# Altium PCB Trackpoint.PcbDoc
Units mm, origin at the board's own origin, x right, y up, seen from the top; angles counter-clockwise.
Board outline 50.8 x 68.8 mm, 4 copper layers (Top Layer, Plane 1, Plane 2, Bottom Layer), stack 0.781 mm thick; 62 components, 31 nets, 224 pads, 191 vias.
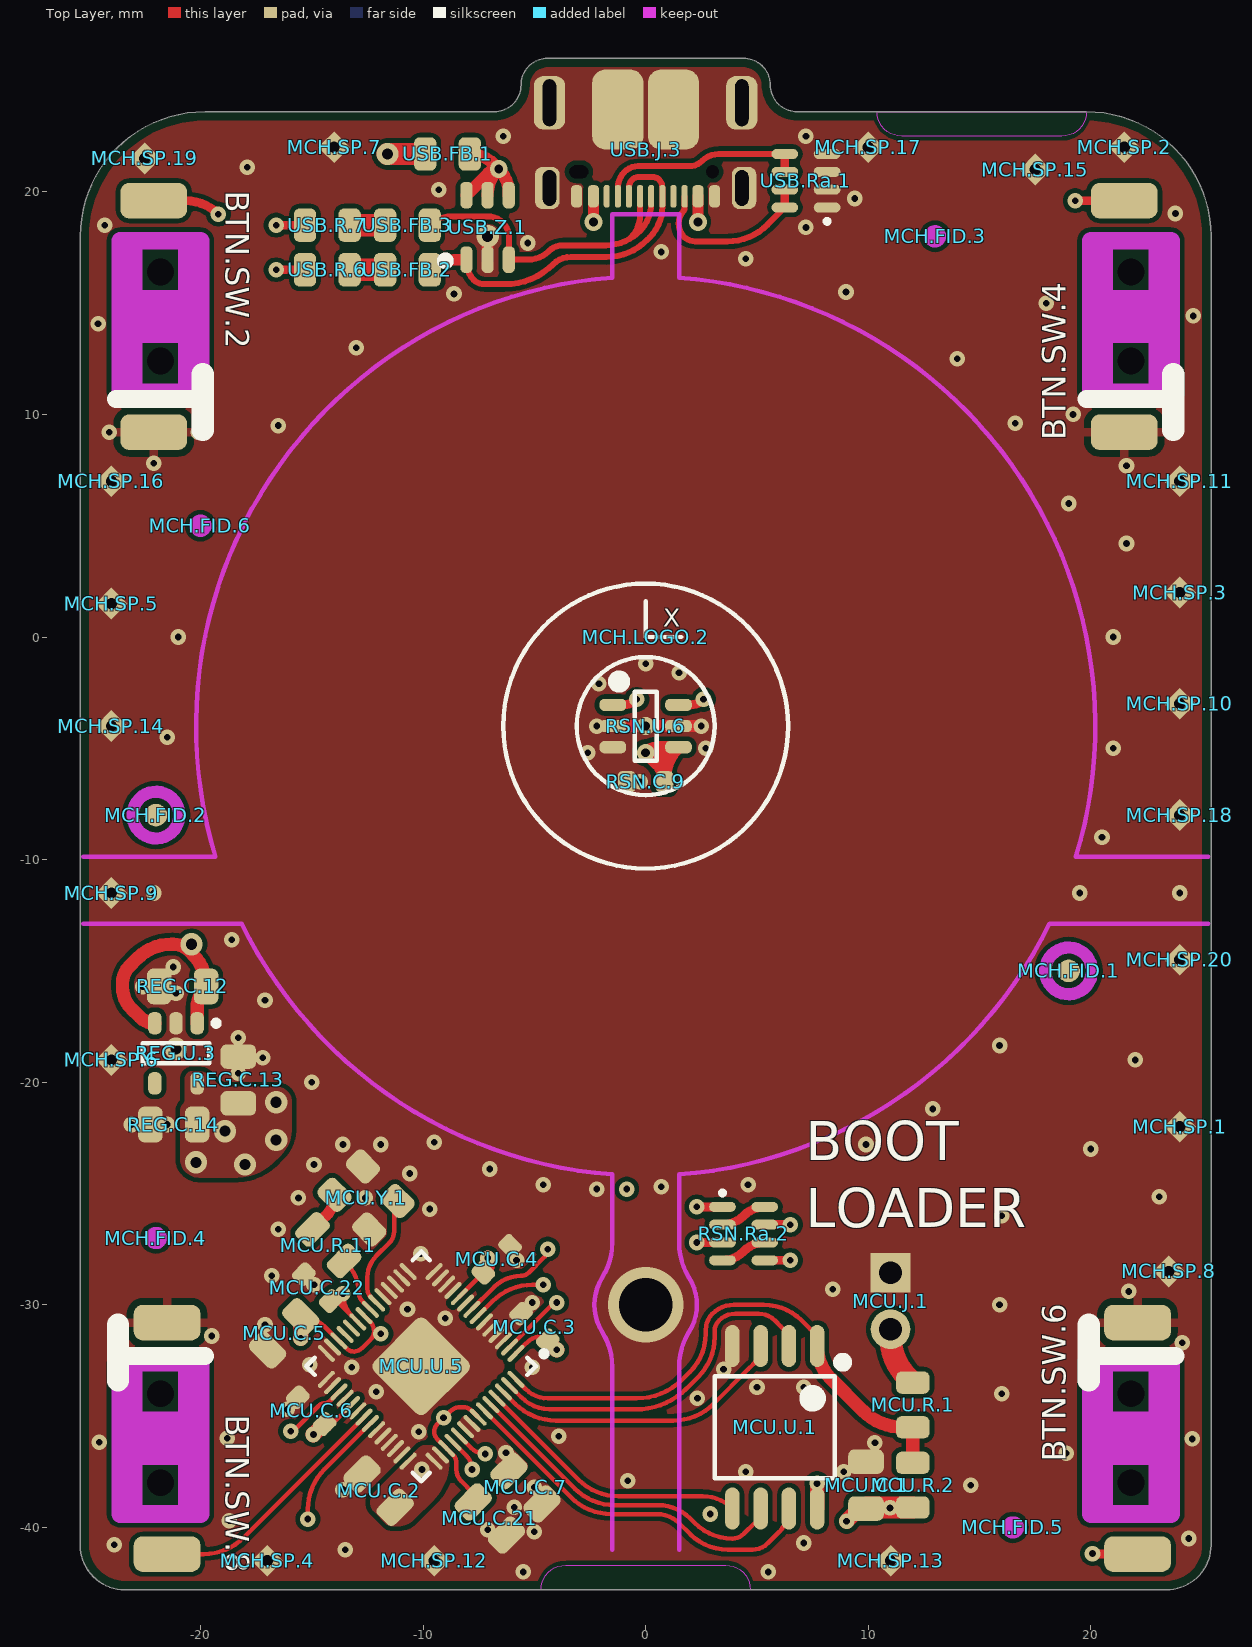
[diagram p0: Top Layer view]
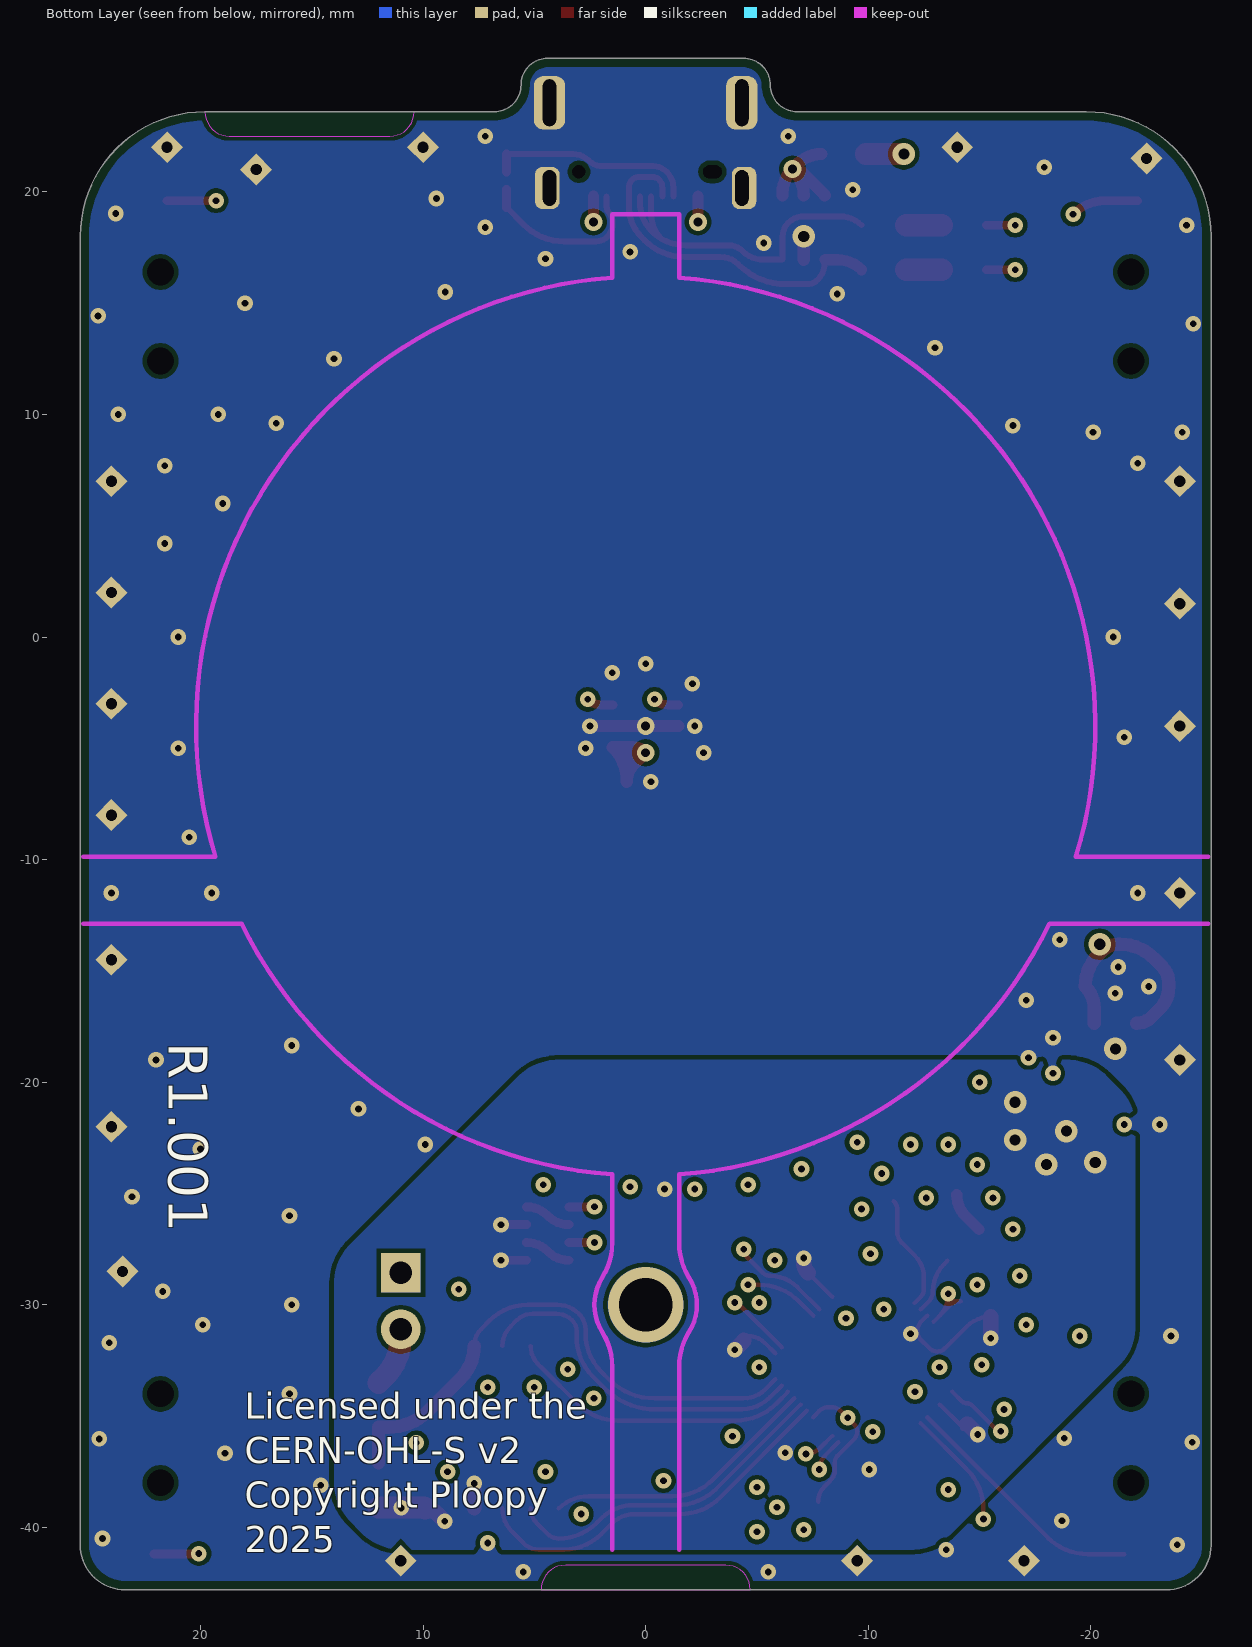
[diagram p1: Bottom Layer view, seen from below]
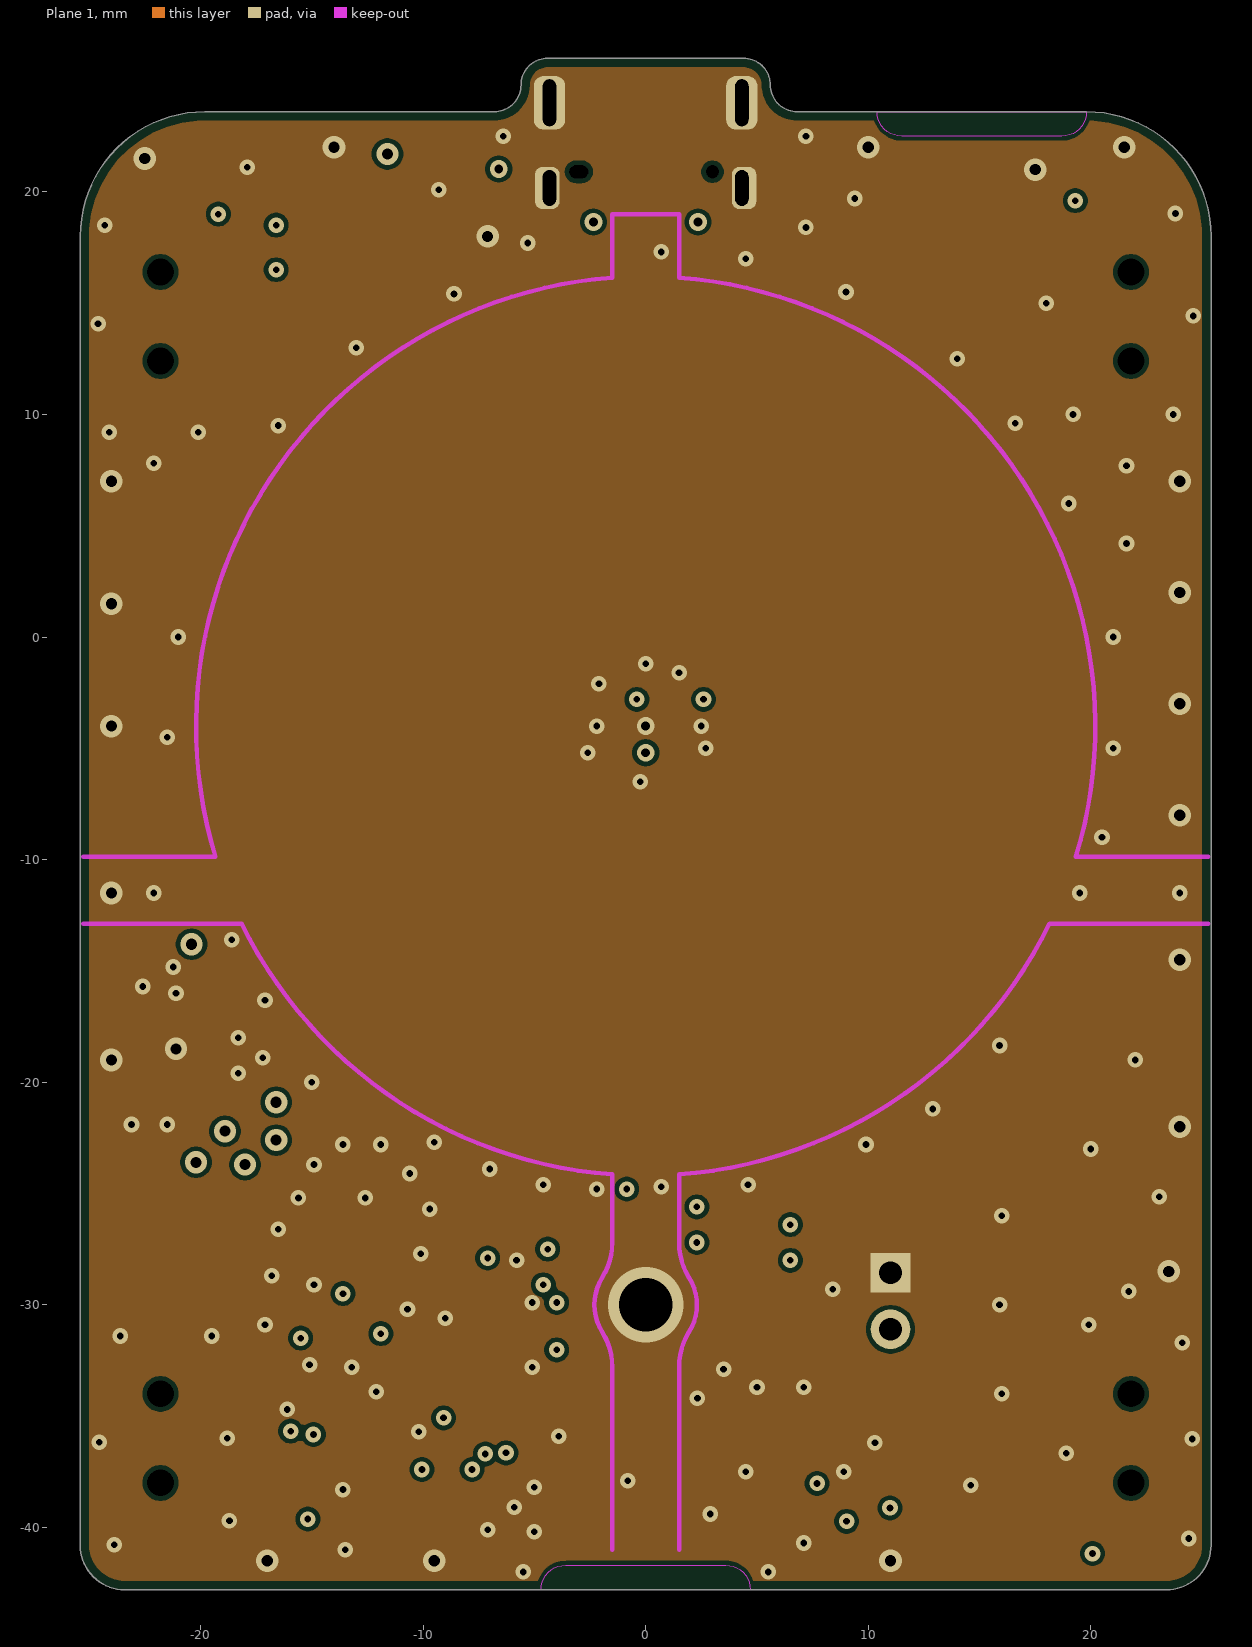
[diagram p2: Plane 1]
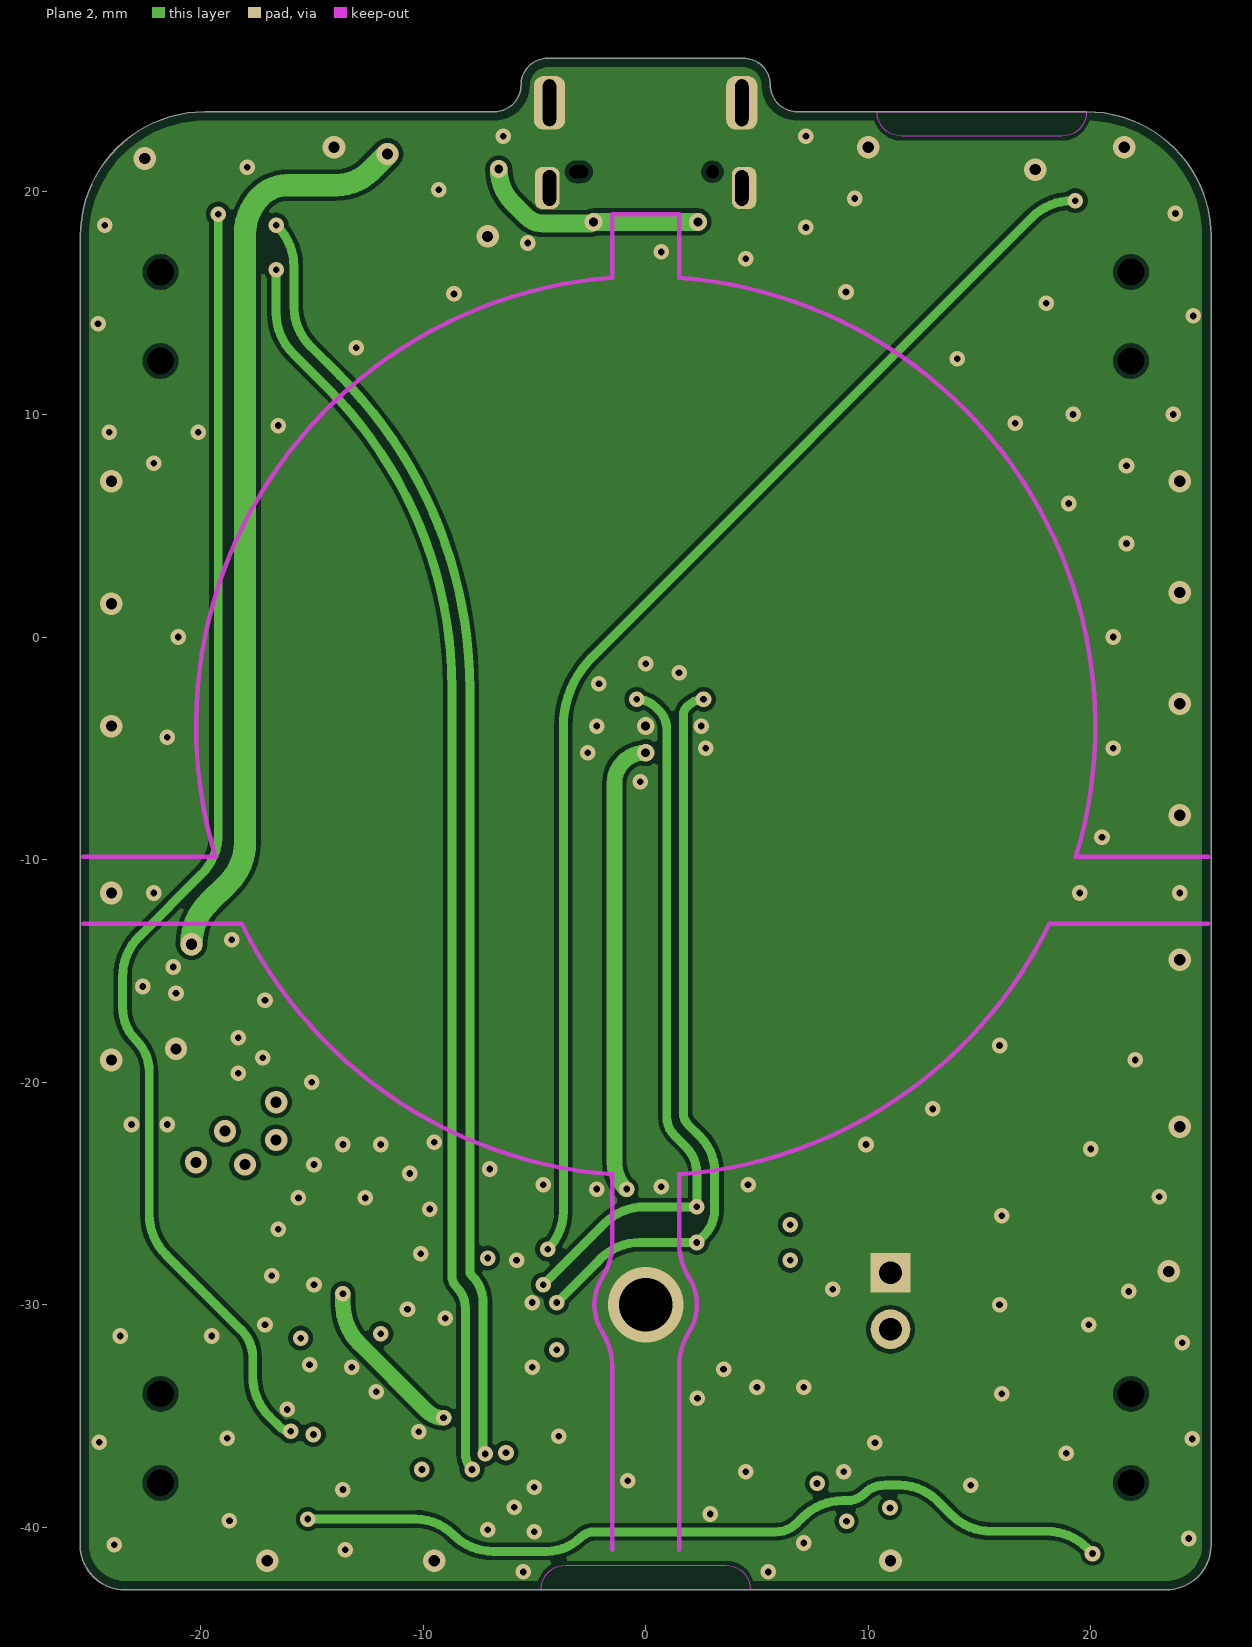
[diagram p3: Plane 2]

## Layer stack, top to bottom
Top Mask: solder mask 0.01, Solder Resist, Dk 3.5
Top Layer: signal copper 0.036
Dielectric 1: prepreg 0.127, FR-4, Dk 4.2
Plane 1: signal copper 0.036
Dielectric 4: core 0.383, Dk 4.2
Plane 2: signal copper 0.036
Dielectric 2: prepreg 0.127, Dk 4.2
Bottom Layer: signal copper 0.036
Bottom Solder: solder mask 0.01, Solder Resist, Dk 3.5

## Board outline
-25.4,-40.8 -25.4,18 cw(c-19.8,18) -19.8,23.6 -6.8,23.6 ccw(c-6.8,24.8) -5.6,24.8 cw(c-4.4,24.8) -4.4,26 4.4,26 cw(c4.4,24.8) 5.6,24.8 ccw(c6.8,24.8) 6.8,23.6 19.8,23.6 cw(c19.8,18) 25.4,18 25.4,-40.8 cw(c23.4,-40.8) 23.4,-42.8 -23.4,-42.8 cw(c-23.4,-40.8)

## Design rules (kind name [scope] priority, off if disabled: settings)
BoardOutlineClearance [(Not HasFootprint('SPARKGAP'))] p1: gap=0.4 ignorepadtopadclearanceinfootprint=FALSE except(0: Arc-SplitBarrior Arc-SplitContinuation Track-SplitBarrior Track-SplitContinuation Fill-SplitBarrior Fill-SplitContinuation Poly-SplitBarrior Poly-SplitContinuation Region-SplitBarrior Region-SplitContinuation Text-SplitBarrior Text-SplitContinuation)
Clearance "HighV Pads" [(InNetClass('HighV') AND (IsPad OR IsVia)) vs IsPad OR IsVia] p1: gap=0.4 ignorepadtopadclearanceinfootprint=FALSE except(0: Arc-Hole Track-Hole SMDPad-Hole THPad-Hole Via-Hole Fill-Hole Poly-Hole Region-Hole Text-Hole) // Establishes minimum clearance between bare pads that are high voltage, per IPC2221A Table 6-1, 51-100V, condition A6
Clearance Inter-Pad [IsPad vs IsPad] p2: gap=0.2 ignorepadtopadclearanceinfootprint=FALSE except(0: Arc-Hole Track-Hole SMDPad-Hole THPad-Hole Via-Hole Fill-Hole Poly-Hole Region-Hole Text-Hole)
Clearance "Spark Gaps" [InNetClass('Spark Gap') vs InNet('GND') And InPoly] p3: gap=0.635 ignorepadtopadclearanceinfootprint=FALSE except(0: Arc-Hole Track-Hole SMDPad-Hole THPad-Hole Via-Hole Fill-Hole Poly-Hole Region-Hole Text-Hole)
Clearance FIDs [Name like 'FID*'] p4: gap=1.016 ignorepadtopadclearanceinfootprint=FALSE except(0: Arc-Hole Track-Hole SMDPad-Hole THPad-Hole Via-Hole Fill-Hole Poly-Hole Region-Hole Text-Hole)
Clearance "Inner Planes" [InPoly AND OnMid] p5: gap=0.2 ignorepadtopadclearanceinfootprint=FALSE // Defines a larger clearance for planes on inner layers.
Clearance "All Planes" [InPoly] p6: gap=0.2 ignorepadtopadclearanceinfootprint=FALSE except(0: Arc-Hole Track-Hole SMDPad-Hole THPad-Hole Via-Hole Fill-Hole Poly-Hole Region-Hole Text-Hole) // Defines minimum clearance between planes on the same layer.
Clearance "Inner Layer Clearance" [OnMid vs OnMid] p7: gap=0.3 ignorepadtopadclearanceinfootprint=FALSE except(0: Arc-Hole Track-Hole SMDPad-Hole THPad-Hole Via-Hole Fill-Hole Poly-Hole Region-Hole Text-Hole) // We will give inner layers more spacing because they tend to be subject to stricter process limits.
Clearance [All] p8: gap=0.2 ignorepadtopadclearanceinfootprint=FALSE // 2 oz (70um) boards require at least 10mil spacing. We give a bit more to make sure things work well.
ComponentClearance "Terminal Block" [(HasFootprint('Phoenix 1933189 - Header')) vs (HasFootprint('Phoenix 1933189 - Header'))] p1: gap=-2.286 collisioncheckmode=3 verticalgap=0.254 showdistances=FALSE
ComponentClearance "FET/TP self Clearance" [(Name like 'Q*') Or (Name like 'TP*') vs (Name like 'Q*') Or (Name like 'TP*')] p2: gap=0.254 collisioncheckmode=3 verticalgap=0.254 showdistances=FALSE
ComponentClearance [Not ((Name like 'H*') Or (Name like 'FID*') Or (Name like 'SP*')) vs Not ((Name like 'H*') Or (Name like 'FID*') Or (Name like 'SP*'))] p3: gap=0.5 collisioncheckmode=3 verticalgap=0.5 showdistances=FALSE
DiffPairsRouting [All] p1: maxlimit=0.508 minlimit=0.279 mostfreqgap=0.381 toplayer_prefgap=0.279 toplayer_minwidth=0.279 toplayer_maxwidth=0.508 toplayer_prefwidth=0.381 midlayer2_mingap=0.305 midlayer2_minwidth=0.305 midlayer2_maxwidth=0.508 midlayer2_prefwidth=0.381 midlayer3_prefgap=0.279 midlayer3_minwidth=0.279 midlayer3_maxwidth=0.508 midlayer3_prefwidth=0.381 bottomlayer_prefgap=0.279 bottomlayer_minwidth=0.279 bottomlayer_maxwidth=0.508 bottomlayer_prefwidth=0.381 substack1={D919DD2D-F60F-4B9F-B5AE-F3E69D6E268F} toplayer_{d919dd2d-f60f-4b9f-b5ae-f3e69d6e268f}_minwidth=0.381 toplayer_{d919dd2d-f60f-4b9f-b5ae-f3e69d6e268f}_maxwidth=0.381 toplayer_{d919dd2d-f60f-4b9f-b5ae-f3e69d6e268f}_prefwidth=0.381 midlayer2_{d919dd2d-f60f-4b9f-b5ae-f3e69d6e268f}_minwidth=0.381 midlayer2_{d919dd2d-f60f-4b9f-b5ae-f3e69d6e268f}_maxwidth=0.381 midlayer2_{d919dd2d-f60f-4b9f-b5ae-f3e69d6e268f}_prefwidth=0.381 midlayer3_{d919dd2d-f60f-4b9f-b5ae-f3e69d6e268f}_minwidth=0.381 midlayer3_{d919dd2d-f60f-4b9f-b5ae-f3e69d6e268f}_maxwidth=0.381 midlayer3_{d919dd2d-f60f-4b9f-b5ae-f3e69d6e268f}_prefwidth=0.381 bottomlayer_{d919dd2d-f60f-4b9f-b5ae-f3e69d6e268f}_minwidth=0.381 bottomlayer_{d919dd2d-f60f-4b9f-b5ae-f3e69d6e268f}_maxwidth=0.381 bottomlayer_{d919dd2d-f60f-4b9f-b5ae-f3e69d6e268f}_prefwidth=0.381 maxuncoupledlength=12.7
Height [All] p1: minheight=0 maxheight=41 prefheight=12.7
HoleSize [All] p1: absolutevalues=TRUE maxlimit=100 minlimit=0.3 maxpercent=80.000 minpercent=20.000
HoleToHoleClearance [All] p1: gap=0.6 allowstackedmicrovias=TRUE
LayerPairs [All] p1: enforce=FALSE
MinimumSolderMaskSliver [All] p1: minsoldermaskwidth=0.09
NetAntennae [Not (HasFootprint('BALANCE_RESISTOR'))] p1: netantennaetolerance=0
PasteMaskExpansion [All] p1: expansion=-0.025
PlaneClearance [All] p1: clearance=0.3
PlaneConnect [All] p1: pad.planeconnectstyle=Relief pad.reliefexpansion=0.5 pad.reliefentries=4 pad.reliefconductorwidth=0.5 pad.reliefairgap=0.25 via.planeconnectstyle=Direct via.reliefexpansion=0.5 via.reliefentries=4 via.reliefconductorwidth=0.5 via.reliefairgap=0.25
PolygonConnect "PolygonConnect Spark Gap" [HasFootprint('SparkGap')] p1: connectstyle=Direct reliefconductorwidth=0.254 reliefentries=4 polygonreliefangle="90 Angle" airgapwidth=0.254 // This rule makes it so spark gaps get direct connections to ground planes.
PolygonConnect PolygonConnect_GND [All vs InNet('GND')] p2: connectstyle=Direct reliefconductorwidth=0.5 reliefentries=4 polygonreliefangle="90 Angle" airgapwidth=0.25 // This rule specifies all vias and holes connected to a GND plane have direct connections.
PolygonConnect [All] p3: connectstyle=Direct reliefconductorwidth=0.5 reliefentries=4 polygonreliefangle="90 Angle" airgapwidth=0.25
RoutingVias [All] p1: holewidth=0.5 width=1 viastyle="Through Hole" minholewidth=0.2 minwidth=0.5 maxholewidth=5.08 maxwidth=6.35
ShortCircuit [Not (InPadClass('TraceResistorPads')) vs Not (InPadClass('TraceResistorPads'))] p1: allowed=FALSE
SilkToBoardRegionClearance [All] p1 off:
SilkToSilkClearance [All] p1 off: silktosilkclearance=0.254
SilkToSolderMaskClearance SilkscreenOverComponentPads [IsPad] p1: minsilkscreentomaskgap=0.102 clearancetoexposedcopper=FALSE
SolderMaskExpansion SolderMaskExpansion_via [IsVia] p1: expansion=0.102 istentingtop=TRUE
SolderMaskExpansion [All] p2: expansion=0.076 istentingtop=FALSE
Width [All] p1: maxlimit=50.8 minlimit=0.2 preferedwidth=0.4 midlayer2_minwidth=0.35 midlayer3_minwidth=0.35 bottomlayer_minwidth=0.26 substack1={D919DD2D-F60F-4B9F-B5AE-F3E69D6E268F} toplayer_{d919dd2d-f60f-4b9f-b5ae-f3e69d6e268f}_minwidth=0.26 midlayer2_{d919dd2d-f60f-4b9f-b5ae-f3e69d6e268f}_minwidth=0.35 midlayer3_{d919dd2d-f60f-4b9f-b5ae-f3e69d6e268f}_minwidth=0.35 bottomlayer_{d919dd2d-f60f-4b9f-b5ae-f3e69d6e268f}_minwidth=0.26 minimp=50.000000 maximp=50.000000 favimp=50.000000
15 further rules are at their usual default settings.

## Classes and differential pairs
component class RSN: RSN.C.9 RSN.Ra.2 RSN.U.6
component class BTN: BTN.SW.2 BTN.SW.4 BTN.SW.6 BTN.SW.8
component class USB: USB.FB.1 USB.FB.2 USB.FB.3 USB.J.3 USB.R.6 USB.R.7 USB.Ra.1 USB.Z.1
component class REG: REG.C.12 REG.C.13 REG.C.14 REG.U.3
component class MCU: MCU.C.1 MCU.C.2 MCU.C.3 MCU.C.4 MCU.C.5 MCU.C.6 MCU.C.7 MCU.C.21 MCU.C.22 MCU.J.1 MCU.R.1 MCU.R.2 MCU.R.11 MCU.U.1 MCU.U.5 MCU.Y.1
component class MCH: MCH.FID.1 MCH.FID.2 MCH.FID.3 MCH.FID.4 MCH.FID.5 MCH.FID.6 MCH.LOGO.2 MCH.SP.1 MCH.SP.2 MCH.SP.3 MCH.SP.4 MCH.SP.5 MCH.SP.6 MCH.SP.7 MCH.SP.8 MCH.SP.9 MCH.SP.10 MCH.SP.11 MCH.SP.12 MCH.SP.13 MCH.SP.14 MCH.SP.15 MCH.SP.16 MCH.SP.17 MCH.SP.18 MCH.SP.19 MCH.SP.20

## Components (designator, comment, footprint, x,y, rotation, side; value= is the part's Value field where it differs from the comment)
BTN.SW.2 "D2LS-21" D2LS-21 -21.8,14.4 r90 top (schematic designator SW2)
BTN.SW.4 "D2LS-21" D2LS-21 21.8,14.4 r90 top (schematic designator SW4)
BTN.SW.6 "D2LS-21" D2LS-21 21.8,-36 r270 top (schematic designator SW6)
BTN.SW.8 "D2LS-21" D2LS-21 -21.8,-36 r270 top (schematic designator SW8)
MCH.FID.1 "IPC-7351 Fiducial 1mm" FIDUCIAL_1.5 19,-15 r90 top (schematic designator FID1)
MCH.FID.2 "IPC-7351 Fiducial 1mm" FIDUCIAL_1.5 -22,-8 r90 top (schematic designator FID2)
MCH.FID.3 "1mm Fiducial for OpenPNP" FIDUCIAL-NEW 13,18 r0 top (schematic designator FID3)
MCH.FID.4 "1mm Fiducial for OpenPNP" FIDUCIAL-NEW -22,-27 r0 top (schematic designator FID4)
MCH.FID.5 "1mm Fiducial for OpenPNP" FIDUCIAL-NEW 16.5,-40 r0 top (schematic designator FID5)
MCH.FID.6 "1mm Fiducial for OpenPNP" FIDUCIAL-NEW -20,5 r0 top (schematic designator FID6)
MCH.LOGO.2 "Coordinate system marker for assembly" "Coordinate System" 0,0 r0 top (schematic designator LOGO2)
MCH.SP.1 "Spark Gap" SparkGap 24,-22 r90 top (schematic designator SP1)
MCH.SP.2 "Spark Gap" SparkGap 21.5,22 r90 top (schematic designator SP2)
MCH.SP.3 "Spark Gap" SparkGap 24,2 r90 top (schematic designator SP3)
MCH.SP.4 "Spark Gap" SparkGap -17,-41.5 r90 top (schematic designator SP4)
MCH.SP.5 "Spark Gap" SparkGap -24,1.5 r90 top (schematic designator SP5)
MCH.SP.6 "Spark Gap" SparkGap -24,-19 r90 top (schematic designator SP6)
MCH.SP.7 "Spark Gap" SparkGap -14,22 r90 top (schematic designator SP7)
MCH.SP.8 "Spark Gap" SparkGap 23.5,-28.5 r90 top (schematic designator SP8)
MCH.SP.9 "Spark Gap" SparkGap -24,-11.5 r90 top (schematic designator SP9)
MCH.SP.10 "Spark Gap" SparkGap 24,-3 r90 top (schematic designator SP10)
MCH.SP.11 "Spark Gap" SparkGap 24,7 r90 top (schematic designator SP11)
MCH.SP.12 "Spark Gap" SparkGap -9.5,-41.5 r90 top (schematic designator SP12)
MCH.SP.13 "Spark Gap" SparkGap 11,-41.5 r90 top (schematic designator SP13)
MCH.SP.14 "Spark Gap" SparkGap -24,-4 r90 top (schematic designator SP14)
MCH.SP.15 "Spark Gap" SparkGap 17.5,21 r90 top (schematic designator SP15)
MCH.SP.16 "Spark Gap" SparkGap -24,7 r90 top (schematic designator SP16)
MCH.SP.17 "Spark Gap" SparkGap 10,22 r90 top (schematic designator SP17)
MCH.SP.18 "Spark Gap" SparkGap 24,-8 r90 top (schematic designator SP18)
MCH.SP.19 "Spark Gap" SparkGap -22.5,21.5 r90 top (schematic designator SP19)
MCH.SP.20 "Spark Gap" SparkGap 24,-14.5 r90 top (schematic designator SP20)
MCU.C.1 "0805 X5R" "0805 - TALL" 9.9,-38.1 r0 top value="1uF 25V" (schematic designator C1)
MCU.C.2 "0805 X5R" "0805 - TALL" -11.996,-38.352 r45 top value="1uF 25V" (schematic designator C2)
MCU.C.3 "0603 X5R" "0603 capacitor - CAPC1608X06N" -5,-31 r225 top value="0.1uF 25V" (schematic designator C3)
MCU.C.4 "0603 X5R" "0603 capacitor - CAPC1608X06N" -6.693,-27.957 r135 top value="0.1uF 25V" (schematic designator C4)
MCU.C.5 "0805 X5R" "0805 - TALL" -16.239,-31.281 r135 top value="1uF 25V" (schematic designator C5)
MCU.C.6 "0603 X5R" "0603 capacitor - CAPC1608X06N" -15.025,-34.758 r225 top value="0.1uF 25V" (schematic designator C6)
MCU.C.7 "0805 X5R" "0805 - TALL" -5.4,-38.2 r225 top value="1uF 25V" (schematic designator C7)
MCU.C.21 "0805 X5R" "0805 - TALL" -7,-39.6 r225 top value="10uF 25V" (schematic designator C21)
MCU.C.22 "0603 X5R" "0603 capacitor - CAPC1608X06N" -14.754,-29.23 r225 top value="0.1uF 25V" (schematic designator C22)
MCU.J.1 "HEADER2" 2x1 11,-28.56 r0 top (schematic designator J1)
MCU.R.1 "0805" 0805 12,-34.5 r0 top value="1k 1%" (schematic designator R1)
MCU.R.2 "0805" 0805 12,-38.1 r180 top value="10k 1%" (schematic designator R2)
MCU.R.11 "0805" 0805 -14.259,-27.321 r225 top value="1k 1%" (schematic designator R11)
MCU.U.1 "W25Q16JVSSIQ" "W25Q128JVS - SOIC127P790X216-8M" 5.8,-35.5 r270 top (schematic designator U1)
MCU.U.5 "RP2040" "RP2040 - QFN40P700X700X90_HS-57M" -10.087,-32.766 r225 top (schematic designator U5)
MCU.Y.1 "RH100-12.000-16-3030" RH100-12.000-16-3030 -12.562,-25.2 r135 top (schematic designator Y1)
REG.C.12 "0805 X5R" "0805 - TALL" -20.8,-15.7 r90 top value="1uF 25V" (schematic designator C12)
REG.C.13 "0805 X5R" "0805 - TALL" -18.3,-19.9 r0 top value="10uF 25V" (schematic designator C13)
REG.C.14 "0805 X5R" "0805 - TALL" -21.2,-21.9 r90 top value="1uF 25V" (schematic designator C14)
REG.U.3 "AP2202K-3.3" "AP2202 - SOT95P270X145-5N" -21.1,-18.7 r270 top (schematic designator U3)
RSN.C.9 "0603 X5R" "0603 capacitor - CAPC1608X06N" 0,-6.5 r270 top value="0.1uF 25V" (schematic designator C9)
RSN.Ra.2 "1206 Quad" "4x 1k 1% - CAC-80P320X160-8M" 4.4,-26.8 r0 top value="1k 1%" (schematic designator Ra2)
RSN.U.6 "TMAG5273" "TMAG5273 - SOT95P280X145-6M" 0,-4 r0 top (schematic designator U6)
USB.FB.1 "ACML-0805-601-T" 0805 -8.9,21.7 r270 top value="Ferrite Bead 600R" (schematic designator FB1)
USB.FB.2 "ACML-0805-601-T" 0805 -10.7,16.5 r270 top value="Ferrite Bead 600R" (schematic designator FB2)
USB.FB.3 "ACML-0805-601-T" 0805 -10.7,18.5 r270 top value="Ferrite Bead 600R" (schematic designator FB3)
USB.J.3 "DX07S016JA1R1500" DX07S016JA1R1500 0,22.8 r180 top (schematic designator J3)
USB.R.6 "0805" 0805 -14.3,16.5 r270 top value="22R 1%" (schematic designator R6)
USB.R.7 "0805" 0805 -14.3,18.5 r270 top value="22R 1%" (schematic designator R7)
USB.Ra.1 "1206 Quad" "4x 10k 1% - CAC-80P320X160-8M" 7.2,20.5 r180 top value="10k 1%" (schematic designator Ra1)
USB.Z.1 "IP4220CZ6,125" "PESD3V3S4UD - SOT95P275X110-6N" -7.1,18.4 r90 top (schematic designator Z1)

## Footprints (in the part's own frame and the unit in brackets; to place one, negate y for a bottom-side part, rotate by r counter-clockwise, add the part's x,y. Pads: shape width x height; smd on the part's side, far side on the other; paste and mask are expansions set on the pad)
2x1 [mil]
  rect 70x70 hole 40 paste-3897.64: 1(0,0)
  round 70 hole 40 paste-3897.64: 2(0,-100)
  body extent -50,-150 50,50, height 339
"4x 1k 1% - CAC-80P320X160-8M" [mm] "Chip Array, Concave, 8-Leads, Pitch 0.80mm,  Body 3.20x1.60mm,  IPC Low Density"
  oval 1.2x0.45 smd paste-99: 1(-0.95,1.2) 2(-0.95,0.4) 3(-0.95,-0.4) 4(-0.95,-1.2) 5(0.95,-1.2) 6(0.95,-0.4) 7(0.95,0.4) 8(0.95,1.2)
  silkscreen extent -1,1.78 -0.9,1.87, body extent -0.9,-1.7 0.9,1.7, height 0.6
"4x 10k 1% - CAC-80P320X160-8M" [mm] "Chip Array, Concave, 8-Leads, Pitch 0.80mm,  Body 3.20x1.60mm,  IPC Low Density"
  oval 1.2x0.45 smd paste-99: 1(-0.95,1.2) 2(-0.95,0.4) 3(-0.95,-0.4) 4(-0.95,-1.2) 5(0.95,-1.2) 6(0.95,-0.4) 7(0.95,0.4) 8(0.95,1.2)
  silkscreen extent -1,1.78 -0.9,1.87, body extent -0.9,-1.7 0.9,1.7, height 0.6
"0603 capacitor - CAPC1608X06N" [mm] "Chip Capacitor, 2-Leads, Body 1.60x0.80mm, IPC Medium Density"
  rrect50% 0.95x0.8 smd: 1(0,-0.85) 2(0,0.85)
  body extent -0.45,-0.85 0.45,0.85, height 0.6
0805 [mm] "Chip Capacitor, 2-Leads, Body 2.0x1.3mm, IPC Medium Density"
  rrect50% 1.5x1 smd paste+0: 1(0,1.002) 2(0,-1.002)
  body extent -0.72,-1.1 0.72,1.1, height 0.8
"0805 - TALL" [mm] "Same as 0805 footprint, but solder mask is adjusted to leave more paste behind for tall (>0.9mm) components like big caps, which tend to be solder-starved on the regular footprint."
  rrect50% 1.6x1.1 smd paste+0: 1(0,1.052) 2(0,-1.052)
  body extent -0.72,-1.1 0.72,1.1, height 0.8
"AP2202 - SOT95P270X145-5N" [mm] "SOT23, 5-Leads, Body 2.92x2.70mm, Pitch 0.95mm, IPC Medium Density"
  rrect80% 1x0.6 smd paste-0.04: 1(-1.35,0.95) 2(-1.35,0) 3(-1.35,-0.95) 4(1.35,-0.95) 5(1.35,0.95)
  silkscreen extent -1.47,-1.5 0.45,1.93, body extent -0.85,-1.52 0.85,1.52, height 1.45
"Coordinate System" [mm]
  silkscreen extent 0,0 1.6,1.6
D2LS-21 [mm]
  rrect50% 1.6x3 smd paste-0.04: A(-5.2,0.3) B(5.2,0.3)
  round 0 hole 1.2 unplated: ""(-2,0) ""(2,0)
  Top Layer keep-out lines w0.8: -0.8,1.8 -0.8,-1.8 ; 0,1.8 0,-1.7 ; 0.8,1.8 0.8,-1.7 ; -3.4,1.2 3.4,1.2 ; -3.4,-1.2 3.4,-1.2 ; -3.4,1.8 -3.4,-1.8 3.4,-1.8 3.4,1.8 -3.4,1.8
  silkscreen extent -5.1,-2 -2.6,2, body extent -5.6,-2.4 5.6,2.4, height 3.19
DX07S016JA1R1500 [mm] "USB-C (USB TYPE-C) USB 2.0 Receptacle Connector 24 (16+8 Dummy) Position Surface Mount, Right Angle; Through Hole"
  rrect70% 0.5x1 smd paste-0.04 mask+0.05: 1(-3.1,3) 2(-2.35,3) 11(2.35,3) 12(3.1,3)
  rrect70% 0.27x1 smd paste-0.02 mask+0.05: 3(-1.75,3) 4(-1.25,3) 5(-0.75,3) 6(-0.25,3) 7(0.25,3) 8(0.75,3) 9(1.25,3) 10(1.75,3)
  rrect60% 1.4x2.4 hole 0.6 slot 2.1 at 90 deg paste-99 mask+0.1: SHELL(-4.32,-1.2) SHELL(4.32,-1.2)
  rrect60% 1.1x1.9 hole 0.6 slot 1.6 at 90 deg copper offset -0.1,0 paste-99 mask+0.1: SHELL(-4.32,2.625)
  rrect52% 2.3x3.6 smd paste-99 mask+0.05: SHELL(-1.25,-0.9) SHELL(1.25,-0.9)
  rrect60% 1.1x1.9 hole 0.6 slot 1.6 at 90 deg copper offset 0.1,0 paste-99 mask+0.1: SHELL(4.32,2.625)
  round 0 hole 0.6: ""(-3,1.9)
  round 0 hole 0.6 slot 0.85 at 0 deg: ""(3,1.9)
  body extent -4.47,-3.65 4.47,3.25, height 3.18
FIDUCIAL-NEW [mm]
  Top Layer keep-out circle w0.6: c0,0 r0.2
FIDUCIAL_1.5 [mil]
  round 40 smd paste-60 mask+30: 1(0,0)
  Top Layer keep-out circle w21.65: c0,0 r41.34
"PESD3V3S4UD - SOT95P275X110-6N" [mm] "SOT23, 6-Leads, Body 2.90x2.75mm, Pitch 0.95mm, IPC Medium Density"
  rrect80% 1.2x0.55 smd paste-0.03 mask+0.085: 1(-1.45,0.95) 2(-1.45,0) 3(-1.45,-0.95) 4(1.45,-0.95) 5(1.45,0) 6(1.45,0.95)
  silkscreen extent -1.62,1.77 -1.38,2.02, body extent -0.85,-1.55 0.85,1.55, height 1.1
RH100-12.000-16-3030 [mm] "3.2mm x 2.5mm crystal"
  rrect50% 1.4x1.1 smd paste-0.1: 1(-1.1,-0.9) 2(1.1,-0.9) 3(1.1,0.9) 4(-1.1,0.9)
  body extent -1.6,-1.25 1.6,1.25, height 1
"RP2040 - QFN40P700X700X90_HS-57M" [mm] "QFN, 56-Leads, Body 7.00x7.00mm, Pitch 0.40mm, Thermal Pad 3.10x3.10mm, IPC Low Density"
  oval 1x0.2 smd paste-99 mask+0.05: 1(-3.425,2.6) 2(-3.425,2.2) 3(-3.425,1.8) 4(-3.425,1.4) 5(-3.425,1) 6(-3.425,0.6) 7(-3.425,0.2) 8(-3.425,-0.2) 9(-3.425,-0.6) 10(-3.425,-1) 11(-3.425,-1.4) 12(-3.425,-1.8) 13(-3.425,-2.2) 14(-3.425,-2.6) 29(3.425,-2.6) 30(3.425,-2.2) 31(3.425,-1.8) 32(3.425,-1.4) 33(3.425,-1) 34(3.425,-0.6) 35(3.425,-0.2) 36(3.425,0.2) 37(3.425,0.6) 38(3.425,1) 39(3.425,1.4) 40(3.425,1.8) 41(3.425,2.2) 42(3.425,2.6)
  oval 0.2x1 smd paste-99 mask+0.05: 15(-2.6,-3.425) 16(-2.2,-3.425) 17(-1.8,-3.425) 18(-1.4,-3.425) 19(-1,-3.425) 20(-0.6,-3.425) 21(-0.2,-3.425) 22(0.2,-3.425) 23(0.6,-3.425) 24(1,-3.425) 25(1.4,-3.425) 26(1.8,-3.425) 27(2.2,-3.425) 28(2.6,-3.425) 43(2.6,3.425) 44(2.2,3.425) 45(1.8,3.425) 46(1.4,3.425) 47(1,3.425) 48(0.6,3.425) 49(0.2,3.425) 50(-0.2,3.425) 51(-0.6,3.425) 52(-1,3.425) 53(-1.4,3.425) 54(-1.8,3.425) 55(-2.2,3.425) 56(-2.6,3.425)
  rrect20% 3.3x3.3 smd paste-99: 57(0,0)
  silkscreen extent -4.42,-3.65 3.65,3.65, body extent -3.5,-3.5 3.5,3.5, height 0.9
SparkGap [mil]
  rect 40x40 smd rot 45 paste-99 mask+4: 1(0,0)
  rect 40x40 smd far side rot 45 paste-99 mask+4: 1(0,0)
"TMAG5273 - SOT95P280X145-6M" [mm] "SOT23, 6-Leads, Body 2.90x2.80mm, Pitch 0.95mm, IPC Low Density"
  rrect80% 1.2x0.55 smd paste-0.05: 1(-1.475,0.95) 2(-1.475,0) 3(-1.475,-0.95) 4(1.475,-0.95) 5(1.475,0) 6(1.475,0.95)
  silkscreen extent -1.45,-1.55 0.5,2.25, body extent -0.88,-1.52 0.87,1.53, height 1.45
"W25Q128JVS - SOIC127P790X216-8M" [mm] "SOIC, 8-Leads, Body 5.28x5.28mm, Pitch 1.27mm, IPC Low Density"
  oval 1.9x0.65 smd paste-0.05: 1(-3.65,1.905) 2(-3.65,0.635) 3(-3.65,-0.635) 4(-3.65,-1.905) 5(3.65,-1.905) 6(3.65,-0.635) 7(3.65,0.635) 8(3.65,1.905)
  silkscreen extent -3.05,-2.7 2.3,3.17, body extent -2.7,-2.7 2.7,2.7, height 2.16

## Part data
BTN.SW.2 BTN.SW.4 BTN.SW.6 BTN.SW.8: "Compact Surface-mounting Switch for long durability", Supplier Part Number 1=Z4378CT-ND, Supplier 1=Digi-Key, Supplier 2=Mouser, Supplier Part Number 2=653-D2LS-21
MCH.FID.1 MCH.FID.2: library part FIDUCIAL_1.5, PNP-A=1, PNP-da=0, PNP-dx=0, PNP-dy=0, PNP-FeedType=Fiducial, PNP-Level=1, PNP-Lv=1, PNP-Nzl=2, PNP-PlacePriority=0, PNP-Pt=0, PNP-TapeIndex=0, PNP-TapeWidth=0, PNP-Thk=1.02, PNP-TS=70, PNP-Type=MARK1, PNP-Voff=0, PNP-W=0, PNP-X=4, PNP-Y=4
MCH.FID.3 MCH.FID.4 MCH.FID.5 MCH.FID.6: library part FIDUCIAL_NEW, "This fiducial is designed to work with OpenPNP. It presents a circular pattern under the solder mask, to prevent glare issues from messing with the detection.", PNP-A=1, PNP-da=0, PNP-dx=0, PNP-dy=0, PNP-FeedType=Fiducial, PNP-Level=1, PNP-Lv=1, PNP-Nzl=2, PNP-PlacePriority=0, PNP-Pt=0, PNP-TapeIndex=0, PNP-TapeWidth=0, PNP-Thk=1.02, PNP-TS=70, PNP-Type=MARK1, PNP-Voff=0, PNP-W=0, PNP-X=4, PNP-Y=4
MCH.LOGO.2: library part CoordinateSystem
MCH.SP.1 MCH.SP.2 MCH.SP.3 MCH.SP.4 MCH.SP.5 MCH.SP.6 MCH.SP.7 MCH.SP.8 MCH.SP.9 MCH.SP.10 MCH.SP.11 MCH.SP.12 MCH.SP.13 MCH.SP.14 MCH.SP.15 MCH.SP.16 MCH.SP.17 MCH.SP.18 MCH.SP.19 MCH.SP.20: "Open square pad for spark gapping", PNP-A=0, PNP-da=0, PNP-dx=0, PNP-dy=0, PNP-FeedType=Tape, PNP-Level=1, PNP-Lv=1, PNP-Nzl=2, PNP-PlacePriority=1, PNP-Pt=0, PNP-TapeIndex=1, PNP-TapeWidth=8, PNP-Thk=1, PNP-TS=70, PNP-Type=CHI, PNP-Voff=0, PNP-W=0, PNP-X=1, PNP-Y=1
MCU.C.1 MCU.C.2 MCU.C.5 MCU.C.7 REG.C.12 REG.C.14: library part "Cap 1uF 25V", "0805, X5R or better", Supplier Part Number 1=1276-1066-2-ND, Supplier 1=Digi-Key, Supplier 2=Digi-Key, Supplier Part Number 2=1276-1066-1-ND
MCU.C.3 MCU.C.4 MCU.C.6 MCU.C.22 RSN.C.9: library part "Cap 0.1uF 25V", "0603, X5R or better", Supplier Part Number 1=1276-6840-2-ND, Supplier 1=Digi-Key
MCU.C.21 REG.C.13: library part "Cap 10uF 25V", "0805, X5R or better", Supplier Part Number 1=81-GRM21BR61E106KA3L, Supplier 1=Mouser, Supplier 2=Digi-Key, Supplier Part Number 2=490-5523-1-ND
MCU.J.1: "2-pin 0.100\" header", Supplier Part Number 1=855-M20-9990245, Supplier 1=Mouser, Supplier 2=Digi-Key, Supplier Part Number 2=952-2261-ND
MCU.R.1 MCU.R.11: library part "Res 1k 1% 0805", "Chip resistor, 1/8W 100PPM", Supplier Part Number 1=RMCF0805FT1K00TR-ND, Supplier 1=Digi-Key
MCU.R.2: library part "Res 10k 1% 0805", "Chip resistor", Supplier Part Number 1=RMCF0805FT10K0TR-ND, Supplier 1=Digi-Key
MCU.U.1: Supplier Part Number 1=W25Q16JVSSIQ-ND, Supplier 1=Digi-Key
MCU.U.5: Supplier Part Number 1=49AJ8740, Supplier 1=Newark
MCU.Y.1: "12MHz Crystal 16pF 100 Ohms 4-SMD, No Lead (3.2mm x 2.5mm)", Supplier Part Number 1=XC2686CT-ND, Supplier 1=Digi-Key, Supplier 2=Mouser, Supplier Part Number 2=520-160-12-30B-AGMT
REG.U.3: "3.3V 150mA LDO regulator", Supplier Part Number 1=621-AP2202K-3.3TRG1, Supplier 1=Mouser, Supplier 2=Digi-Key, Supplier 3=Arrow, Supplier Part Number 2=AP2202K-3.3TRG1DICT-ND, Supplier Part Number 3=PWagzdsTFFHKE_U17B45SP-NtndBrheJIaI5hB7gHD0ZVywxIBNyoAQstvnyfZZ0
RSN.Ra.2: library part "Quad Res 1k 1% 1206", "Chip resistor"
RSN.U.6: "Low-Power Linear 3D Hall-Effect Sensor With I2C Interface"
USB.FB.1 USB.FB.2 USB.FB.3: "FERRITE BEAD 600 OHM 0805 1LN", Supplier Part Number 1=535-12556-1-ND, Supplier 1=Digi-Key
USB.J.3: "USB-C (USB TYPE-C) USB 2.0 Receptacle Connector 24 (16+8 Dummy) Position Surface Mount, Right Angle; Through Hole", Supplier Part Number 1=670-DX07S016JA1R1500CT-ND, Supplier 1=Digi-Key, Supplier 2=Mouser, Supplier Part Number 2=656-DX07S016JA1R1500
USB.R.6 USB.R.7: library part "Res 22R 1% 0805", "Chip resistor", Supplier Part Number 1=RMCF0805FT22R0CT-ND, Supplier 1=Digi-Key, Supplier 2=Arrow, Supplier Part Number 2=RMCF0805FT22R0
USB.Ra.1: library part "Quad Res 10k 1% 1206", "Chip resistor"
USB.Z.1: "TVS DIODE 5.5V 6TSOP (Low capacitance, USB)", Supplier Part Number 1=1727-3578-1-ND, Supplier 1=Digi-Key, Supplier 2=Mouser, Supplier 3=Arrow, Supplier Part Number 2=771-IP4220CZ6-T/R, Supplier Part Number 3=IP4220CZ6,125

## Via types
v1: diameter 0.7, hole 0.3, Top Layer to Bottom Layer, tented both sides, 156 vias
v2: diameter 1.016, hole 0.508, Top Layer to Bottom Layer, tented both sides, 20 vias
v3: diameter 1, hole 0.5, Top Layer to Bottom Layer, tented both sides, 9 vias
v4: diameter 0.8, hole 0.4, Top Layer to Bottom Layer, tented both sides, 5 vias
v5: diameter 3.4, hole 2.4, Top Layer to Bottom Layer, 1 vias

## Nets (pads, with @x,y where several pads share a name; then routed paths per layer and width w, separated by ;. In a path a pad name is that pad's centre, name@x,y a point inside that pad or via, vN(x,y) a via of type N, cw(c..) or ccw(c..) an arc to the next point about the centre after c; other vN are vias at no path point)
1V1: MCU.C.21.2 MCU.C.22.2 MCU.U.5.23 MCU.U.5.45 MCU.U.5.50 | length 17.3
  Top Layer w0.2: v1(-13.6,-29.5) ccw(c-12.149,-29.5) -13.548,-29.886 ; MCU.U.5.23@-13.175,-30.526 MCU.U.5.23 ; MCU.C.21.2 ccw(c-8.71,-38.856) -8.027,-38.173 -8.3,-37.9 cw(c-7.817,-37.417) -8.5,-37.417 -8.5,-37.1 ccw(c-8.987,-37.1) -8.643,-36.756 MCU.U.5.45 -9.36,-36.038 cw(c-9.021,-35.7) -9.5,-35.7 cw(c-9.017,-35.7) -9.359,-35.359 v1(-9.079,-35.079) -8.8,-34.8 cw(c-8.317,-35.283) -8.317,-34.6 -8.2,-34.6 cw(c-8.2,-35.156) -7.807,-34.763 MCU.U.5.50 ; -13.548,-29.886 ccw(c-13.679,-30.017) -13.679,-29.831 MCU.C.22.2 cw(c-14.153,-30.514) -13.67,-30.031 -13.176,-30.526 cw(c-12.149,-29.5) -13.177,-30.524 -13.217,-30.485 cw(c-12.933,-30.202) -13.258,-30.436 cw(c-12.149,-29.5) -13.548,-29.886
  Plane 2 w0.7: v1(-13.6,-29.5) -13.6,-29.948 ccw(c-11.06,-29.948) -12.856,-31.744 -9.833,-34.767 ccw(c-9.079,-34.014) v1(-9.079,-35.079)
3V3: MCU.C.1.2 MCU.C.2.2 MCU.C.3.2 MCU.C.4.2 MCU.C.5.2 MCU.C.6.2 MCU.C.7.2 MCU.R.2.1 MCU.U.1.8 MCU.U.5.1 MCU.U.5.10 MCU.U.5.22 MCU.U.5.26 MCU.U.5.33 MCU.U.5.42 MCU.U.5.43 MCU.U.5.44 MCU.U.5.48 MCU.U.5.49 REG.C.13.2 REG.C.14.2 REG.U.3.5 RSN.C.9.2 RSN.Ra.2.5 RSN.Ra.2.7 RSN.U.6.4 | length 45.9
  Top Layer w0.2: MCU.C.5.2 cw(c-15.495,-32.065) -14.414,-30.984 MCU.U.5.26 -13.438,-31.96 ccw(c-13.1,-31.621) -13.1,-32.1 ccw(c-13.1,-31.617) -12.759,-31.959 -12.341,-31.541 ccw(c-12.683,-31.2) -12.2,-31.2 ccw(c-12.839,-31.2) -12.304,-30.85 ccw(c-12.65,-31.051) -12.367,-30.769 -12.386,-30.75 ccw(c-12.839,-31.2) -12.387,-30.749 MCU.U.5.22 ; MCU.C.6.2@-14.224,-35.559 cw(c-14.052,-35.559) -14.174,-35.438 MCU.U.5.33 ; MCU.U.5.10 MCU.C.4.2 ; MCU.U.5.1 -5.361,-31.717 cw(c-4.599,-32.479) MCU.C.3.2@-4.599,-31.401
  Top Layer w0.4: RSN.Ra.2.5 v1(6.5,-28) ; RSN.Ra.2.7 v1(6.5,-26.4)
  Top Layer w0.55: v4(0,-5.2) cw(c0.604,-5.804) 0.604,-4.95 RSN.U.6.4 ccw(c2.984,-6.459) 1.082,-5.492 ; v4(0,-5.2) 0.376,-5.2 cw(c0.376,-6.198) 1.082,-5.492 ; v4(0,-5.2) 0.532,-5.732 cw(c-0.236,-6.5) RSN.C.9.2 0.85,-6.459 cw(c2.984,-6.459) 1.082,-5.492
  Top Layer w0.65: v1(7.7,-38.025) 7.705,-38.03 MCU.U.1.8
  Top Layer w0.7: v1(-15.5,-31.5) -15.5,-30.542 MCU.C.5.2 ; v1(-14.925,-35.825) -14.484,-35.384 cw(c-14.424,-35.444) MCU.C.6.2 ; MCU.C.4.2 ccw(c-7.762,-28.09) -7.1,-28.09 v1(-7.1,-27.9) ; MCU.C.3.2 ccw(c-4.339,-31.601) -4.381,-31.644 v1(-4,-32.025) ; v1(9.025,-39.725) 9.384,-39.366 cw(c9.9,-39.882) MCU.C.1.2
  Top Layer w1: MCU.C.1.2 cw(c10.021,-39.273) 10.021,-39.102 MCU.R.2.1
  Plane 2 w0.7: v1(-0.85,-24.8) -0.9,-24.8 cw(c0.307,-23.593) -1.4,-23.593 -1.4,-6.566 cw(c-0.034,-6.566) -1,-5.6 cw(c-0.034,-6.566) -0.034,-5.2 v4(0,-5.2)
  other v1: 10.975,-39.125 -10.05,-37.4 -6.275,-36.65 -11.9,-31.3
  other v3: -18,-23.7 -20.2,-23.6 -16.6,-22.6 -18.9,-22.2 -16.6,-20.9
GND: BTN.SW.2.A BTN.SW.4.A BTN.SW.6.A BTN.SW.8.A MCH.SP.1.1 MCH.SP.2.1 MCH.SP.3.1 MCH.SP.4.1 MCH.SP.5.1 MCH.SP.6.1 MCH.SP.7.1 MCH.SP.8.1 MCH.SP.9.1 MCH.SP.10.1 MCH.SP.11.1 MCH.SP.12.1 MCH.SP.13.1 MCH.SP.14.1 MCH.SP.15.1 MCH.SP.16.1 MCH.SP.17.1 MCH.SP.18.1 MCH.SP.19.1 MCH.SP.20.1 MCU.C.1.1 MCU.C.2.1 MCU.C.3.1 MCU.C.4.1 MCU.C.5.1 MCU.C.6.1 MCU.C.7.1 MCU.C.21.1 MCU.C.22.1 MCU.J.1.1 MCU.U.1.4 MCU.U.5.3 MCU.U.5.4 MCU.U.5.5 MCU.U.5.6 MCU.U.5.9 MCU.U.5.11 MCU.U.5.12 MCU.U.5.13 MCU.U.5.14 MCU.U.5.15 MCU.U.5.16 MCU.U.5.17 MCU.U.5.18 MCU.U.5.19 MCU.U.5.27 MCU.U.5.28 MCU.U.5.29 MCU.U.5.30 MCU.U.5.32 MCU.U.5.34 MCU.U.5.37 MCU.U.5.38 MCU.U.5.39 MCU.U.5.40 MCU.U.5.41 MCU.U.5.57 MCU.Y.1.2 MCU.Y.1.4 REG.C.12.1 REG.C.13.1 REG.C.14.1 REG.U.3.2 RSN.C.9.1 RSN.U.6.2 RSN.U.6.3 RSN.U.6.5 USB.J.3.1 USB.J.3.12 USB.J.3.SHELL USB.Ra.1.1 USB.Ra.1.2 USB.Ra.1.3 USB.Ra.1.4 USB.Z.1.2 | length 5
  Top Layer w0.55: USB.Z.1.2 v3(-7.1,18) ; RSN.U.6.2 v4(0,-4) RSN.U.6.5 v1(2.5,-4)
  other v1: -5.5,-42 5.5,-42 -13.5,-41 -23.875,-40.775 7.1,-40.7 24.4,-40.5 -5,-40.2 -7.1,-40.1 -18.7,-39.7 2.9,-39.4 -5.9,-39.1 -13.6,-38.3 -5,-38.2 14.6,-38.1 -0.8,-37.9 4.5,-37.5 8.9,-37.5 18.9,-36.675 10.3,-36.2 -24.55,-36.175 24.55,-36.025 -18.8,-36 -3.9,-35.9 -10.2,-35.7 -16.1,-34.7 2.325,-34.2 16,-34 -12.1,-33.9 5,-33.7 7.1,-33.7 3.5,-32.9 -13.2,-32.8 -5.1,-32.8 -15.1,-32.7 24.1,-31.7 -23.6,-31.4 -19.5,-31.4 -17.1,-30.9 19.9,-30.9 -9,-30.6 -10.7,-30.2 15.9,-30 -5.1,-29.9 21.7,-29.4 8.4,-29.3 -14.9,-29.1 -16.8,-28.7 -5.8,-28 -10.1,-27.7 -16.5,-26.6 16,-26 -9.7,-25.7 -15.6,-25.2 -12.6,-25.2 23.075,-25.15 -2.2,-24.8 0.7,-24.7 -4.6,-24.6 4.6,-24.6 -10.6,-24.1 -7,-23.9 -14.9,-23.7 20,-23 -13.6,-22.8 -11.9,-22.8 9.9,-22.8 -9.5,-22.7 -23.1,-21.9 -21.5,-21.9 12.9,-21.2 -15,-20 -18.3,-19.6 22,-19 -17.2,-18.9 15.9,-18.35 -18.3,-18 -17.1,-16.325 -21.1,-16 -22.6,-15.7 -21.224,-14.824 -18.6,-13.6 -22.1,-11.5 19.5,-11.5 24,-11.5 20.5,-9 -0.236,-6.5 -2.6,-5.2 2.7,-5 21,-5 -21.5,-4.5 -2.2,-4 -2.1,-2.1 1.5,-1.6 0,-1.2 -21,0 21,0 21.6,4.2 19,6 21.6,7.7 -22.1,7.8 -24.1,9.2 -20.1,9.2 -16.5,9.5 16.6,9.6 19.2,10 23.7,10 14,12.5 -13,13 -24.6,14.075 24.6,14.425 18,15 -8.611,15.414 9,15.5 4.5,17 0.7,17.3 -5.3,17.7 7.2,18.4 -24.3,18.5 23.8,19.025 9.4,19.7 -9.3,20.1 -17.9,21.1 -6.4,22.5 7.2,22.5
  other v2: -17,-41.5 -9.5,-41.5 11,-41.5 23.5,-28.5 24,-22 -24,-19 24,-14.5 -24,-11.5 24,-8 -24,-4 24,-3 -24,1.5 24,2 -24,7 24,7 17.5,21 -22.5,21.5 -14,22 10,22 21.5,22
  other v3: -21.1,-18.5
  other v5: 0,-30
NetBTN.SW.2_B: BTN.SW.2.B MCU.U.5.31 | length 65
  Top Layer w0.2: v1(-15.95,-35.675) ccw(c-15.95,-35.373) -15.737,-35.587 -14.681,-34.531 cw(c-14.425,-34.787) -14.425,-34.425 ccw(c-14.425,-34.104) -14.198,-34.331 MCU.U.5.31
  Top Layer w0.4: BTN.SW.2.B -20.649,19.6 cw(c-20.649,17.551) v1(-19.2,19)
  Plane 2 w0.4: v1(-19.2,19) -19.2,-8.848 cw(c-21.74,-8.848) -19.944,-10.644 -22.756,-13.456 ccw(c-20.96,-15.252) -23.5,-15.252 -23.5,-16.651 ccw(c-21.451,-16.651) -22.9,-18.1 cw(c-24.349,-19.549) -22.3,-19.549 -22.3,-25.948 ccw(c-19.76,-25.948) -21.556,-27.744 -18.163,-31.137 cw(c-19.4,-32.375) -17.65,-32.375 -17.65,-33.223 ccw(c-15.11,-33.223) -16.906,-35.019 -16.462,-35.463 ccw(c-15.95,-34.951) v1(-15.95,-35.675)
NetBTN.SW.4_B: BTN.SW.4.B MCU.U.5.8 | length 63.9
  Top Layer w0.2: MCU.U.5.8 -6.802,-29.198 cw(c-5.6,-30.401) -5.6,-28.7 ccw(c-5.6,-28.217) -5.259,-28.559 -4.541,-27.841 ccw(c-4.883,-27.5) v1(-4.4,-27.5)
  Top Layer w0.4: v1(19.3,19.6) BTN.SW.4.B
  Plane 2 w0.4: v1(-4.4,-27.5) ccw(c-6.09,-25.81) -3.7,-25.81 -3.7,-4.025 cw(c0.707,-4.025) -2.409,-0.909 17.356,18.856 cw(c19.152,17.06) 19.152,19.6 v1(19.3,19.6)
NetBTN.SW.6_B: BTN.SW.6.B MCU.U.5.36 | length 44.8
  Top Layer w0.2: v1(-15.175,-39.625) -15.175,-39.188 cw(c-12.635,-39.188) -14.431,-37.392 MCU.U.5.36
  Top Layer w0.4: v1(20.075,-41.175) 20.1,-41.2 BTN.SW.6.B
  Plane 2 w0.4: v1(-15.175,-39.625) -10.349,-39.625 cw(c-10.349,-42.036) -8.645,-40.33 ; -8.644,-40.331 ccw(c-6.848,-38.535) -6.848,-41.075 -4.434,-41.075 ccw(c-4.434,-38.941) -2.925,-40.45 cw(c-2.321,-41.054) -2.321,-40.2 5.834,-40.2 ccw(c5.834,-38.834) 6.8,-39.8 7.056,-39.544 cw(c8.852,-41.34) 8.852,-38.8 9.076,-38.8 ccw(c9.076,-37.776) 9.8,-38.5 cw(c10.766,-39.466) 10.766,-38.1 11.4,-38.1 cw(c11.4,-40.514) 13.107,-38.807 13.731,-39.431 ccw(c15.527,-37.635) 15.527,-40.175 18.023,-40.175 cw(c18.023,-42.715) 19.819,-40.919 v1(20.075,-41.175)
NetBTN.SW.8_B: BTN.SW.8.B MCU.U.5.35 | length 11.3
  Top Layer w0.2: BTN.SW.8.B -19.856,-41.2 ccw(c-19.856,-38.66) -18.06,-40.456 MCU.U.5.35
NetMCU.J.1_2: MCU.J.1.2 MCU.R.1.1 | length 2.7
  Top Layer w1: MCU.J.1.2 11,-31.445 ccw(c13.54,-31.445) 11.744,-33.242 MCU.R.1.1
NetMCU.R.1_2: MCU.R.1.2 MCU.R.2.2 MCU.U.1.1 MCU.U.5.56 | length 24.8
  Top Layer w0.2: MCU.U.5.56@-5.81,-33.365 MCU.U.5.56 -5.383,-33.793 ccw(c-4.4,-32.81) -4.4,-34.2 -0.394,-34.2 ccw(c-0.394,-31.319) 1.644,-33.356 1.993,-33.007 ccw(c0.286,-31.3) 2.7,-31.3 2.7,-31.124 cw(c3.724,-31.124) 3,-30.4 cw(c3.966,-31.366) 3.966,-30 5.31,-30 cw(c5.31,-32.39) 7,-30.7 7.39,-31.09 cw(c6.631,-31.85) MCU.U.1.1
  Top Layer w0.6: MCU.U.1.1 ccw(c9.769,-31.85) 8.31,-33.31 9.758,-34.758 ccw(c11.555,-32.962) 11.555,-35.502 MCU.R.1.2 MCU.R.2.2
NetMCU.R.11_1: MCU.R.11.1 MCU.U.5.21 | length 2.6
  Top Layer w0.2: MCU.R.11.1 -13.409,-28.171 cw(c-14.638,-29.4) -12.9,-29.4 ccw(c-12.249,-29.4) -12.709,-29.861 MCU.U.5.21
NetMCU.R.11_2: MCU.R.11.2 MCU.Y.1.3 | length 1.9
  Top Layer w0.5: MCU.R.11.2 -14.374,-26.018 ccw(c-15.334,-25.058) MCU.Y.1.3
NetMCU.U.1_2: MCU.U.1.2 MCU.U.5.55 | length 16.1
  Top Layer w0.2: MCU.U.5.55 -5.58,-34.162 ccw(c-4.27,-32.843) -4.336,-34.7 -0.435,-34.7 ccw(c-0.435,-31.477) 1.844,-33.756 2.356,-33.244 ccw(c0.56,-31.448) 3.1,-31.448 3.1,-31.183 cw(c3.783,-31.183) 3.3,-30.7 cw(c4.024,-31.424) 4.024,-30.4 5.076,-30.4 cw(c5.076,-31.424) 5.8,-30.7 6.071,-30.971 cw(c5.192,-31.85) MCU.U.1.2
NetMCU.U.1_3: MCU.U.1.3 MCU.U.5.54 | length 13.5
  Top Layer w0.2: MCU.U.5.54 -5.866,-34.441 ccw(c-4.034,-32.61) -4.034,-35.2 -0.476,-35.2 ; 4.599,-32.901 3.044,-34.456 cw(c1.248,-32.66) 1.248,-35.2 -0.472,-35.2 ; 4.6,-32.9 4.822,-32.678 ccw(c3.994,-31.85) MCU.U.1.3 ; -0.476,-35.2 ccw(c-0.476,-31.636) -0.472,-35.2 ; -0.476,-35.2 -0.472,-35.2
NetMCU.U.1_5: MCU.U.1.5 MCU.U.5.53 | length 12.4
  Top Layer w0.2: MCU.U.5.53 -3.017,-37.856 ccw(c-1.221,-36.06) -1.221,-38.6 2.567,-38.6 cw(c2.567,-40.478) MCU.U.1.5
NetMCU.U.1_6: MCU.U.1.6 MCU.U.5.52 | length 15
  Top Layer w0.2: MCU.U.5.52 -3.182,-38.256 ccw(c-1.386,-36.46) -1.386,-39 0.551,-39 cw(c0.551,-41.049) 2,-39.6 2.193,-39.793 ccw(c3.9,-38.086) 3.9,-40.5 ccw(c3.9,-39.776) 4.412,-40.288 4.893,-39.807 ccw(c4.236,-39.15) MCU.U.1.6
NetMCU.U.1_7: MCU.U.1.7 MCU.U.5.51 | length 17
  Top Layer w0.2: MCU.U.5.51 -3.348,-38.656 ccw(c-1.552,-36.86) -1.552,-39.4 0.5,-39.4 cw(c0.5,-40.849) 1.524,-39.824 ; 1.524,-39.824 2,-40.3 ccw(c3.69,-38.61) 3.69,-41 4.8,-41 ccw(c4.8,-40.034) 5.483,-40.717 6,-40.2 ccw(c4.95,-39.15) MCU.U.1.7
NetMCU.U.5_2: MCU.U.5.2 RSN.Ra.2.3 RSN.U.6.6 | length 38.2
  Top Layer w0.2: MCU.U.5.2 -4.188,-29.978 cw(c-4,-30.166) v1(-4,-29.9)
  Top Layer w0.4: RSN.U.6.6 1.996,-3.05 ccw(c1.996,-2.196) v1(2.6,-2.8) ; v1(2.3,-27.2) RSN.Ra.2.3
  Plane 2 w0.4: v1(-4,-29.9) -2.044,-27.944 cw(c-0.248,-29.74) -0.248,-27.2 v1(2.3,-27.2) 2.634,-26.866 ccw(c1.51,-25.741) 3.1,-25.741 3.1,-24.011 ccw(c0.901,-24.011) 2.456,-22.456 1.9,-21.9 cw(c2.383,-21.417) 1.7,-21.417 1.7,-3.49 cw(c2.191,-3.49) 1.917,-3.083 cw(c2.6,-3.766) v1(2.6,-2.8)
NetMCU.U.5_7: MCU.U.5.7 RSN.Ra.2.1 RSN.U.6.1 | length 37.9
  Top Layer w0.2: MCU.U.5.7 -6.883,-29.844 cw(c-5.087,-31.64) -5.087,-29.1 v1(-4.6,-29.1)
  Top Layer w0.4: RSN.U.6.1 -1.004,-3.05 ccw(c-1.004,-2.196) v1(-0.4,-2.8) ; v1(2.3,-25.6) RSN.Ra.2.1
  Plane 2 w0.4: v1(-4.6,-29.1) -1.844,-26.344 cw(c-0.048,-28.14) -0.048,-25.6 v1(2.3,-25.6) 2.3,-24.107 ccw(c0.608,-24.107) 1.805,-22.911 1.805,-22.905 1.3,-22.4 cw(c2.151,-21.549) 0.948,-21.549 0.948,-4.139 ccw(c-0.239,-4.139) 0.6,-3.3 0.454,-3.154 ccw(c-0.4,-4.007) v1(-0.4,-2.8)
NetMCU.U.5_20: MCU.U.5.20 MCU.Y.1.1 | length 5.2
  Top Layer w0.2: MCU.U.5.20@-12.357,-29.648 -12.368,-29.636 cw(c-12.085,-29.354) -12.452,-29.512 cw(c-12.007,-29.3) -12.5,-29.3 -12.5,-28.766 cw(c-11.134,-28.766) -12.1,-27.8 -11.512,-27.212 ccw(c-12.024,-26.7) -11.3,-26.7 -11.3,-25.709 cw(c-10.78,-25.709) MCU.Y.1.1 ; MCU.U.5.20@-12.356,-29.649 MCU.U.5.20
NetMCU.U.5_46: MCU.U.5.46 USB.R.6.2 | length 59.3
  Top Layer w0.2: MCU.U.5.46 -8.06,-36.773 cw(c-8.687,-37.4) v1(-7.8,-37.4)
  Top Layer w0.4: v1(-16.6,16.5) USB.R.6.2
  Plane 2 w0.4: v1(-16.6,16.5) -16.6,14.552 ccw(c-14.06,14.552) -15.856,12.756 -14.282,11.182 cw(c-27.758,-2.294) -8.7,-2.294 -8.7,-28.717 ccw(c-8.017,-28.717) -8.5,-29.2 cw(c-9.466,-30.166) -8.1,-30.166 -8.1,-36.676 ccw(c-7.076,-36.676) v1(-7.8,-37.4)
NetMCU.U.5_47: MCU.U.5.47 USB.R.7.2 | length 60.7
  Top Layer w0.2: MCU.U.5.47 -7.826,-36.441 ccw(c-7.2,-35.814) v1(-7.2,-36.7)
  Top Layer w0.4: v1(-16.6,18.5) USB.R.7.2
  Plane 2 w0.4: v1(-16.6,18.5) -16.544,18.444 cw(c-18.34,16.648) -15.8,16.648 -15.8,14.852 ccw(c-13.26,14.852) -15.056,13.056 -13.728,11.728 cw(c-27.8,-2.343) -7.9,-2.343 -7.9,-28.459 ccw(c-7.559,-28.459) -7.8,-28.7 cw(c-9.007,-29.907) -7.3,-29.907 -7.3,-36.459 ccw(c-6.959,-36.459) v1(-7.2,-36.7)
NetREG.C.12_2: REG.C.12.2 REG.U.3.1 REG.U.3.3 USB.FB.1.2 | length 52.6
  Top Layer w0.6: REG.U.3.3 cw(c-22.05,-16.384) -22.733,-17.067 -23.1,-16.7 cw(c-22.134,-15.734) -23.5,-15.734 -23.5,-15.524 cw(c-22.476,-15.524) -23.2,-14.8 -22.836,-14.436 cw(c-21.3,-15.973) -21.3,-13.8 -21.224,-13.8 cw(c-21.224,-14.824) -20.5,-14.1 -20.347,-14.253 cw(c-21.794,-15.7) REG.C.12.2 ccw(c-18.776,-16.671) -20.15,-16.671 REG.U.3.1
  Top Layer w1: v3(-11.6,21.7) USB.FB.1.2
  Plane 2 w1: v3(-20.4,-13.8) -20.4,-13.752 cw(c-17.86,-13.752) -19.656,-11.956 -18.744,-11.044 ccw(c-20.54,-9.248) -18,-9.248 -18,18.11 cw(c-15.61,18.11) -17.3,19.8 cw(c-16.093,18.593) -16.093,20.3 -13.9,20.3 ccw(c-13.9,22.473) -12.364,20.936 v3(-11.6,21.7)
NetRSN.Ra.2_2: RSN.Ra.2.2 RSN.Ra.2.8 | length 2.1
  Top Layer w0.4: RSN.Ra.2.2 ccw(c3.45,-25.072) 4.389,-26.011 4.411,-25.989 cw(c5.35,-26.928) RSN.Ra.2.8
NetRSN.Ra.2_4: RSN.Ra.2.4 RSN.Ra.2.6 | length 2.1
  Top Layer w0.4: RSN.Ra.2.4 ccw(c3.45,-26.672) 4.389,-27.611 4.411,-27.589 cw(c5.35,-28.528) RSN.Ra.2.6
NetUSB.FB.1_1: USB.FB.1.1 USB.J.3.2 USB.J.3.11 USB.Z.1.4 USB.Z.1.5 USB.Z.1.6 | length 18.7
  Top Layer w0.5: v4(-2.35,18.65) USB.J.3.11 ; v4(2.35,18.65) USB.J.3.2
  Top Layer w0.55: USB.Z.1.6 -7.069,20.831 cw(c-6.6,20.361) v4(-6.6,21.025) ; USB.FB.1.1 cw(c-7.898,20.197) -6.835,21.26 v4(-6.6,21.025) ; USB.Z.1.5 cw(c-5.47,19.85) -6.623,21.002 v4(-6.6,21.025) ; USB.Z.1.4 -6.15,19.939 ccw(c-7.686,19.939) v4(-6.6,21.025)
  Plane 2 w0.8: v4(-6.6,21.025) ccw(c-4.427,21.025) -5.964,19.489 -5.375,18.9 ccw(c-4.59,19.685) -4.59,18.575 -2.531,18.575 ccw(c-2.531,18.831) v4(-2.35,18.65) v4(2.35,18.65)
NetUSB.FB.2_1: USB.FB.2.1 USB.J.3.5 USB.J.3.8 USB.Z.1.1 | length 16.1
  Top Layer w0.27: USB.Z.1.1 -8.05,16.835 ccw(c-6.94,16.835) -7.725,16.05 ccw(c-7.242,16.533) -7.242,15.85 -6.322,15.85 ccw(c-6.322,18.92) -4.151,16.749 ; -4.15,16.75 cw(c-3.364,15.963) -3.364,17.075 -1.752,17.075 ccw(c-1.752,19.615) 0.044,17.819 0.175,17.95 ccw(c-1.213,19.338) 0.75,19.338 USB.J.3.5 0.75,20.188 ccw(c0.238,20.188) 0.6,20.55 ccw(c0.298,20.248) 0.298,20.675 -0.298,20.675 ccw(c-0.298,20.248) -0.6,20.55 ccw(c-0.238,20.188) -0.75,20.188 USB.J.3.8
  Top Layer w0.5: USB.FB.2.1 cw(c-8.611,15.414) -8.611,16.95 USB.Z.1.1
NetUSB.FB.2_2: USB.FB.2.2 USB.R.6.1 | length 1.6
  Top Layer w1: USB.R.6.1 USB.FB.2.2
NetUSB.FB.3_1: USB.FB.3.1 USB.J.3.6 USB.J.3.7 USB.Z.1.3 | length 15.4
  Top Layer w0.27: USB.FB.3.1 cw(c-8.732,17.534) -8.732,18.9 -7.1,18.9 cw(c-7.1,17.934) -6.417,18.617 -6.4,18.6 cw(c-7.004,17.996) -6.15,17.996 USB.Z.1.3 -5.29,16.95 ccw(c-5.29,18.287) -4.344,17.342 cw(c-3.721,16.718) -4.147,17.49 cw(c-3.721,16.718) -3.721,17.6 -1.784,17.6 ccw(c-1.784,19.734) -0.698,17.897 ; USB.J.3.7 -0.25,18.979 cw(c-1.78,18.979) -0.698,17.897 ; USB.J.3.6 USB.J.3.6@0.25,19.492 ; -0.698,17.897 ccw(c-1.784,19.734) -0.275,18.225 ccw(c-1.542,19.492) 0.236,19.268 ; 0.236,19.268 ccw(c-0.177,19.377) 0.25,19.377 USB.J.3.6@0.25,19.492 ; 0.236,19.268 ccw(c-1.542,19.492) USB.J.3.6@0.25,19.492
NetUSB.FB.3_2: USB.FB.3.2 USB.R.7.1 | length 1.6
  Top Layer w1: USB.R.7.1 USB.FB.3.2
NetUSB.J.3_3: USB.J.3.3 USB.Ra.1.7 USB.Ra.1.8 | length 7.9
  Top Layer w0.27: USB.J.3.3 1.75,19.316 cw(c1.409,19.316) 1.65,19.075 ccw(c2.324,18.571) 1.729,17.975 ccw(c2.212,18.459) 2.212,17.775 3.673,17.775 ccw(c3.673,20.315) 5.469,18.519 USB.Ra.1.8
  Top Layer w0.4: USB.Ra.1.8 USB.Ra.1.7
NetUSB.J.3_9: USB.J.3.9 USB.Ra.1.5 USB.Ra.1.6 | length 9.4
  Top Layer w0.27: USB.J.3.9 -1.25,20.176 cw(c-0.226,20.176) -0.95,20.9 cw(c-0.346,20.296) -0.346,21.15 1.946,21.15 ccw(c1.946,22.004) 2.55,21.4 cw(c3.274,20.676) 3.274,21.7 USB.Ra.1.5
  Top Layer w0.4: USB.Ra.1.6 USB.Ra.1.5
pads on no net: BTN.SW.2. BTN.SW.4. BTN.SW.6. BTN.SW.8. MCH.FID.1.1 MCH.FID.2.1 MCU.U.5.24 MCU.U.5.25 REG.U.3.4 USB.J.3. USB.J.3.4 USB.J.3.10

## Polygon pours and split planes (outlines as drawn)
GND on Top Layer "GND_L01_P005" (solid, remove dead copper, pour order 5): -26,27 -26,-43 26,-43 26,27
3V3 on Top Layer "3V3_L01_P003" (solid, remove dead copper, pour order 3): -10.216,-36.441 cw(c-9.875,-36.783) -9.875,-36.3 -9.737,-36.3 cw(c-9.737,-36.812) -9.375,-36.45 -8.86,-36.965 cw(c-8.946,-37.05) -8.825,-37.05 cw(c-11.3,-37.05) -9.55,-38.8 -10.417,-39.667 cw(c-11.1,-38.984) -11.1,-39.95 -11.409,-39.95 cw(c-11.409,-39.609) -11.65,-39.85 -12.216,-39.284 cw(c-11.832,-38.9) -12.375,-38.9 cw(c-11.651,-38.9) -12.163,-38.388 -11.075,-37.3
3V3 on Top Layer "3V3_L01_P002" (solid, remove dead copper, pour order 2): -7.506,-35.494 ccw(c-7.25,-35.238) -7.25,-35.6 -6.977,-35.6 cw(c-6.977,-36.027) -6.675,-35.725 -5.388,-37.012 cw(c-5.602,-37.225) -5.3,-37.225 cw(c-5.662,-37.225) -5.406,-37.481 -5.425,-37.5 cw(c-5.847,-37.078) -5.847,-37.675 -5.875,-37.675 cw(c-5.875,-37.011) -6.344,-37.481 -8.432,-35.393 cw(c-8.39,-35.35) -8.45,-35.35 cw(c-8.269,-35.35) -8.397,-35.222 -8.143,-34.968 cw(c-8.1,-35.01) -8.1,-34.95 -8.085,-34.95 cw(c-8.085,-35.035) -8.025,-34.975
3V3 on Top Layer "3V3_L01_P000" (solid, remove dead copper, pour order 0): -20.083,-19.5 cw(c-20.083,-20.183) -19.6,-19.7 -19.312,-19.988 ccw(c-18.8,-19.476) -18.8,-20.2 -16.583,-20.2 cw(c-16.583,-20.883) -16.1,-20.4 cw(c-16.583,-20.883) -15.9,-20.883 -15.9,-22.093 cw(c-17.607,-22.093) -16.4,-23.3 -16.656,-23.556 cw(c-18.452,-21.76) -18.452,-24.3 -19.976,-24.3 cw(c-19.976,-23.276) -20.7,-24 cw(c-20.217,-23.517) -20.9,-23.517 -20.9,-21.241 cw(c-20.559,-21.241) -20.8,-21 ccw(c-21.041,-20.759) -20.7,-20.759 -20.7,-19.841 cw(c-20.359,-19.841) -20.6,-19.6 cw(c-20.359,-19.841) -20.359,-19.5 -20.3,-19.5
GND on Bottom Layer "GND_L04_P008" (solid, remove dead copper, pour order 8): -26,27 -26,-43 26,-43 26,27
3V3 on Bottom Layer "3V3_L04_P004" (solid, remove dead copper, pour order 4): -22,-30.948 ccw(c-19.46,-30.948) -21.256,-32.744 -13.744,-40.256 ccw(c-11.948,-38.46) -11.948,-41 10.948,-41 ccw(c10.948,-38.46) 12.744,-40.256 13.256,-39.744 ccw(c11.46,-37.948) 14,-37.948 14,-29.052 ccw(c11.46,-29.052) 13.256,-27.256 5.744,-19.744 ccw(c3.948,-21.54) 3.948,-19 -18.948,-19 ccw(c-18.948,-21.54) -20.744,-19.744 -21.293,-20.293 ccw(c-19.586,-22) -22,-22
GND on Plane 1 "GND_L02_P006" (solid, remove dead copper, pour order 6): -26,27 -26,-43 26,-43 26,27
GND on Plane 2 "GND_L03_P007" (solid, remove dead copper, pour order 7): -26,27 -26,-43 26,-43 26,27

## Keep-outs
Keep-Out Layer:
  region: 3.6,-41.7 cw(c3.6,-42.8) 4.7,-42.8 -4.7,-42.8 cw(c-3.6,-42.8) -3.6,-41.7
  region: 11.5,22.5 cw(c11.5,23.6) 10.4,23.6 19.8,23.6 cw(c18.7,23.6) 18.7,22.5
  lines w0.2: -25.275,-12.874 -18.146,-12.874 ccw(c0,-4) -1.5,-24.144 -1.5,-27.2 cw(c-4.5,-27.2) -1.953,-28.785 ccw(c0,-30) -1.953,-31.215 cw(c-4.5,-32.8) -1.5,-32.8 -1.5,-41 ; -25.275,-9.874 -19.327,-9.874 cw(c0,-4) -1.5,16.144 -1.5,19 ; -1.5,17.4 -1.5,19 ; 1.5,-41 1.5,-32.8 cw(c4.5,-32.8) 1.953,-31.215 ccw(c0,-30) 1.953,-28.785 cw(c4.5,-27.2) 1.5,-27.2 1.5,-24.144 ccw(c0,-4) 18.146,-12.874 25.275,-12.874 ; 1.5,17.4 1.5,19 ; 25.275,-9.875 19.327,-9.874 ccw(c0,-4) 1.5,16.144 1.5,19 ; -1.5,19 1.5,19

## Silkscreen, mask and mechanical layers (free items; w line width, h text height)
Top Overlay:
  circle w0.2: c0,-4 r3.1
  circle w0.2: c0,-4 r6.4
  text "BOOT / LOADER" at 7.2,-27.1 h3
Bottom Overlay:
  text "R1.001" at 22,-18.2 h3 r90
  text "Licensed under the / CERN-OHL-S v2 / Copyright Ploopy  / 2025" at 18,-41.5 h2
Board Outline:
  the board outline again, w0.2

## Text inside footprints (layer, text, board x,y; h text height)
MCH.LOGO.2: Top Overlay "X" at 0.799,0.2 h1.4